# EAGLE board element (EAGLE 9.1.3)
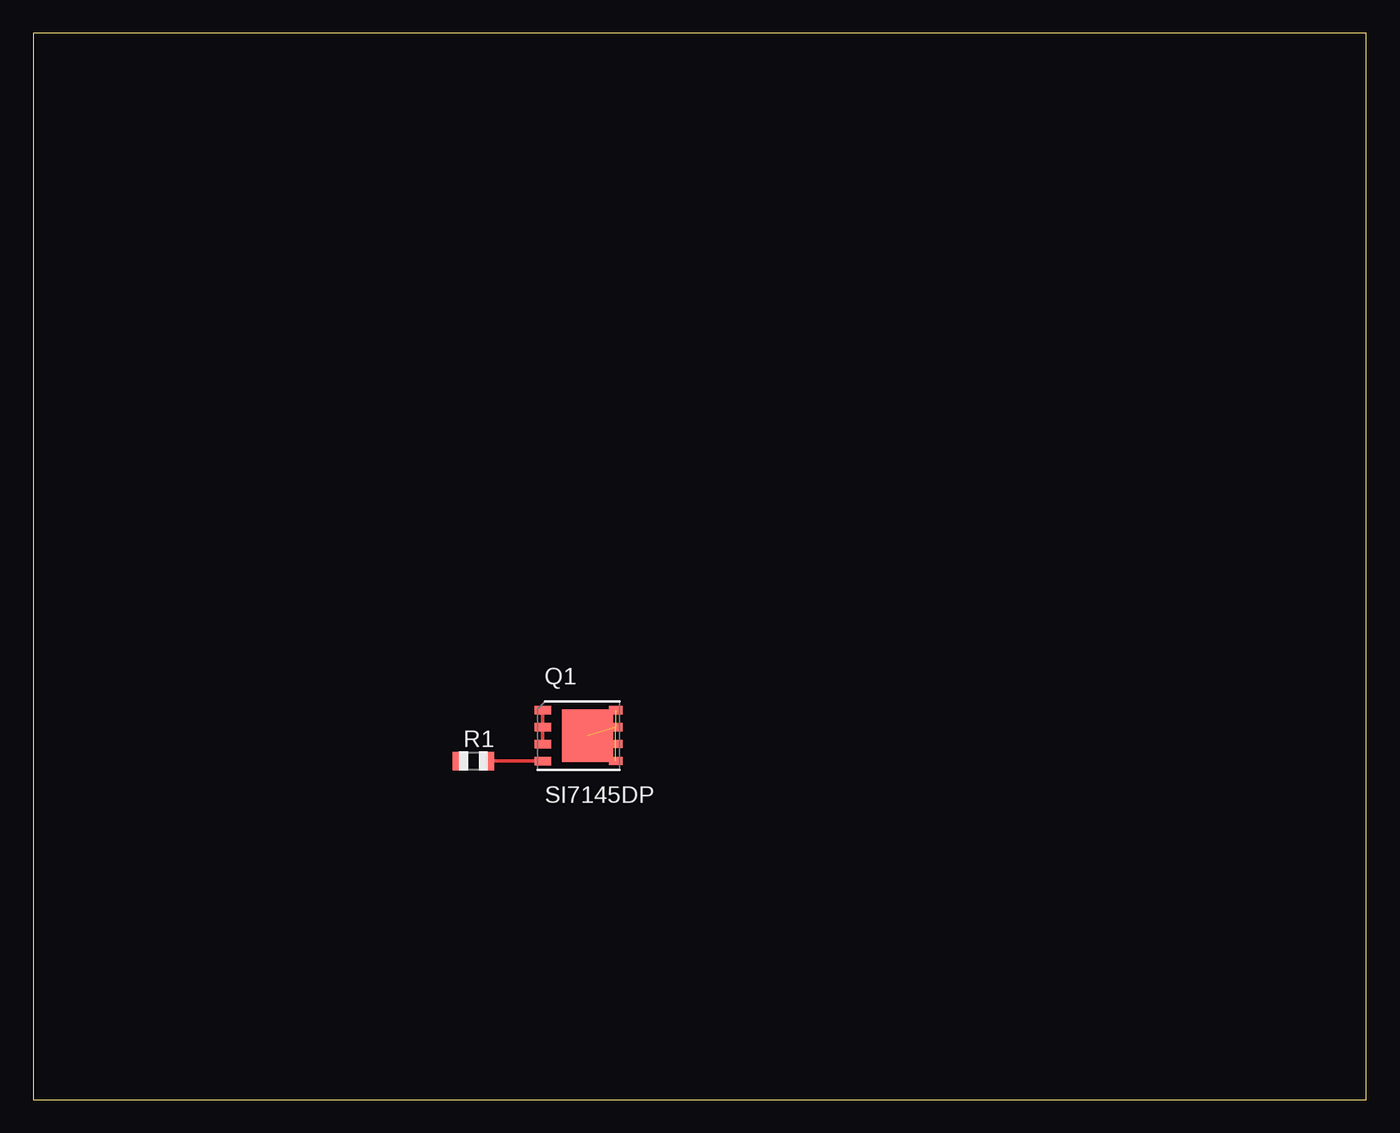
[diagram p0: board, top side]

Size 100 x 80 mm. Coordinates in mm from the lower left corner, seen from the top.
Outline: 0,0 100,0 100,80 0,80 0,0
Copper layers (1*16): Top 0.035mm / dielectric 1.5mm / Bottom 0.035mm
Design rules "default": minimum track width 6mil, minimum drill 0.35mm, track to track 6mil, track to pad 6mil, pad to pad 6mil, via to via 6mil, smd to smd 6mil, copper to edge 40mil, drill to drill 6mil, minimum pad ring 10mil, minimum via ring 8mil, stop-mask expansion 4mil, vias tented up to drill 0mil, thermal gap 10mil

## Footprints (pad centres in the part's own frame; a part is rotated, then mirrored left to right if it is on the bottom)
SO-8/PPAK/TEST = smd 1.02 x 0.61: D@1 2.795,-1.905; D@2 2.795,-0.635; D@3 2.795,0.635; D@4 2.795,1.905 | smd 3.81 x 3.91: D@5 0.69,0 | smd 1.27 x 0.635: G -2.67,-1.905; S@1 -2.67,1.905; S@2 -2.67,0.635; S@3 -2.67,-0.635
R0805 = smd 1.1 x 1.4: 1 -1,0; 2 1,0

## Placement (x,y rotation side)
Q1  SI7145DP  [SO-8/PPAK/TEST]  40.89,27.3 0 top
R1  10k  [R0805]  33.02,25.4 0 top

## Library data of the parts
Q1 = Si7145DP; MPN: SI7145DP-T1-GE3; OC_NEWARK: 63R6006
R1 = adafruit; MPN: RC0603FR-0710KL; OC_NEWARK: 68R0049

## Nets
0: R1.1
IN: Q1.D@1 Q1.D@2 Q1.D@3 Q1.D@4 Q1.D@5
N$2: Q1.G R1.2
OUT: Q1.S@1 Q1.S@2 Q1.S@3

## Tracks (layer width: path | path; a pad name or v marks a point on that pad's centre or on a via)
IN  (4 unrouted)
N$2
  Top 0.254: R1.2 Q1.G
OUT
  Top 0.254: Q1.S@1 Q1.S@2 Q1.S@3